# Altium PCB AN970.PcbDoc
Units mil, origin at the board's own origin, x right, y up, seen from the top; angles counter-clockwise.
Board outline 7207.12 x 4095.49 mil, 2 copper layers (TOP, BOTTOM), stack 10.4 mil thick; 1 components, 107 nets, 48 pads, 0 vias.
Unrouted connection lines stored in the file: 3.
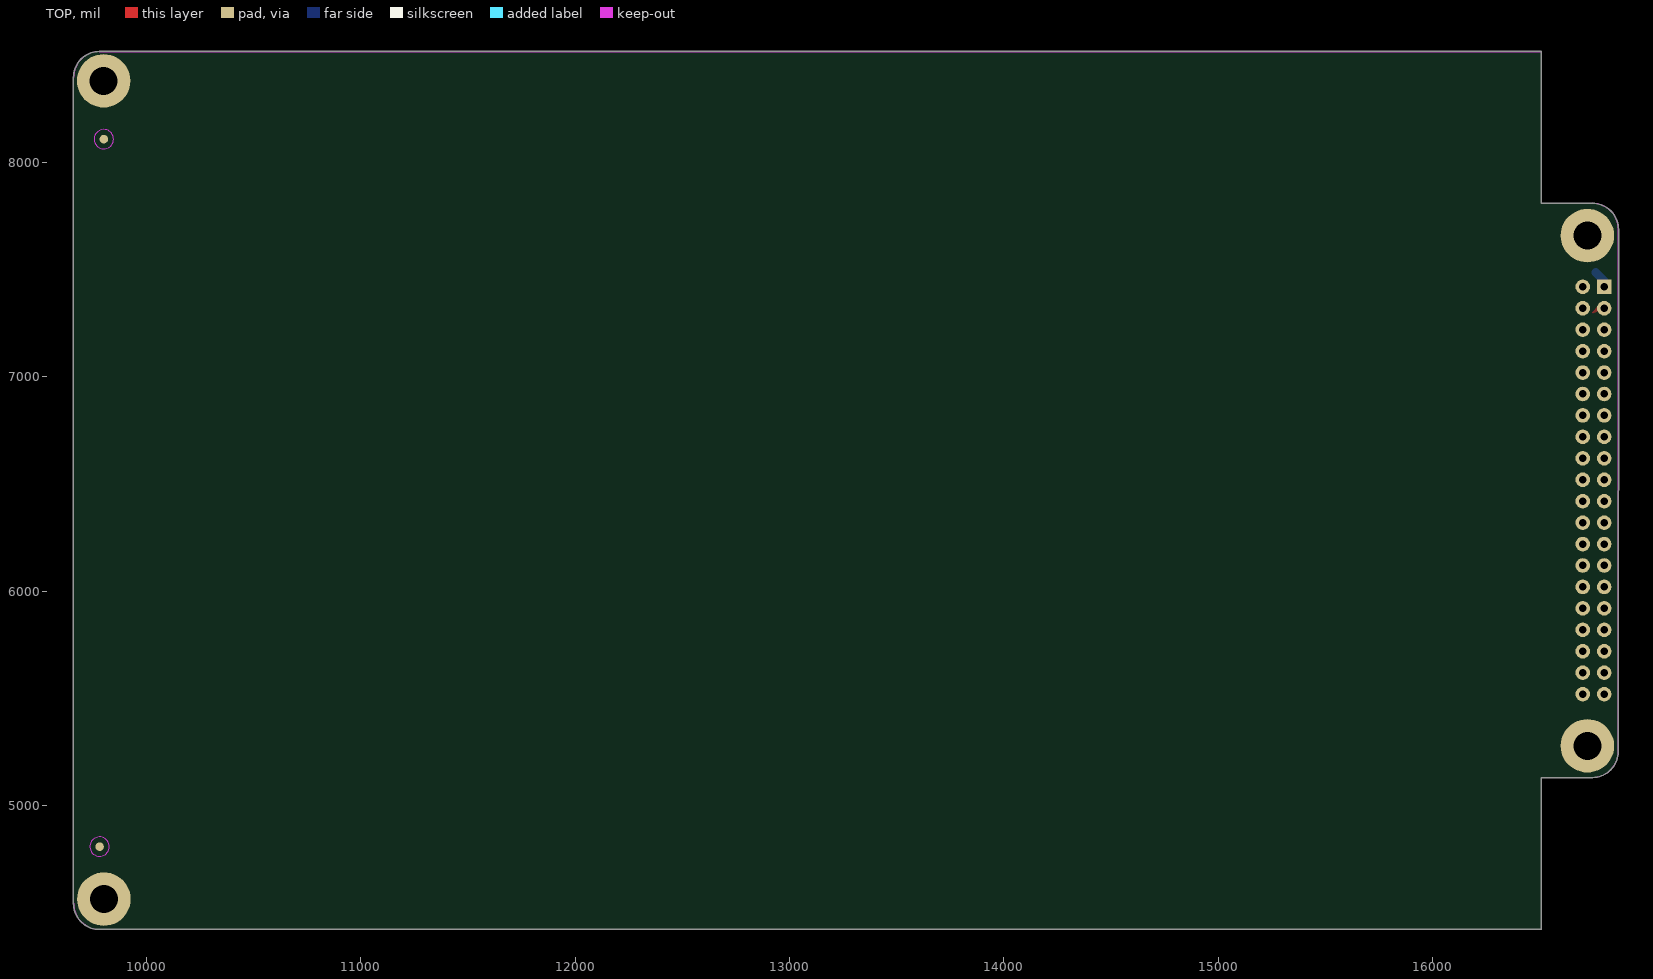
[diagram p0: TOP view]
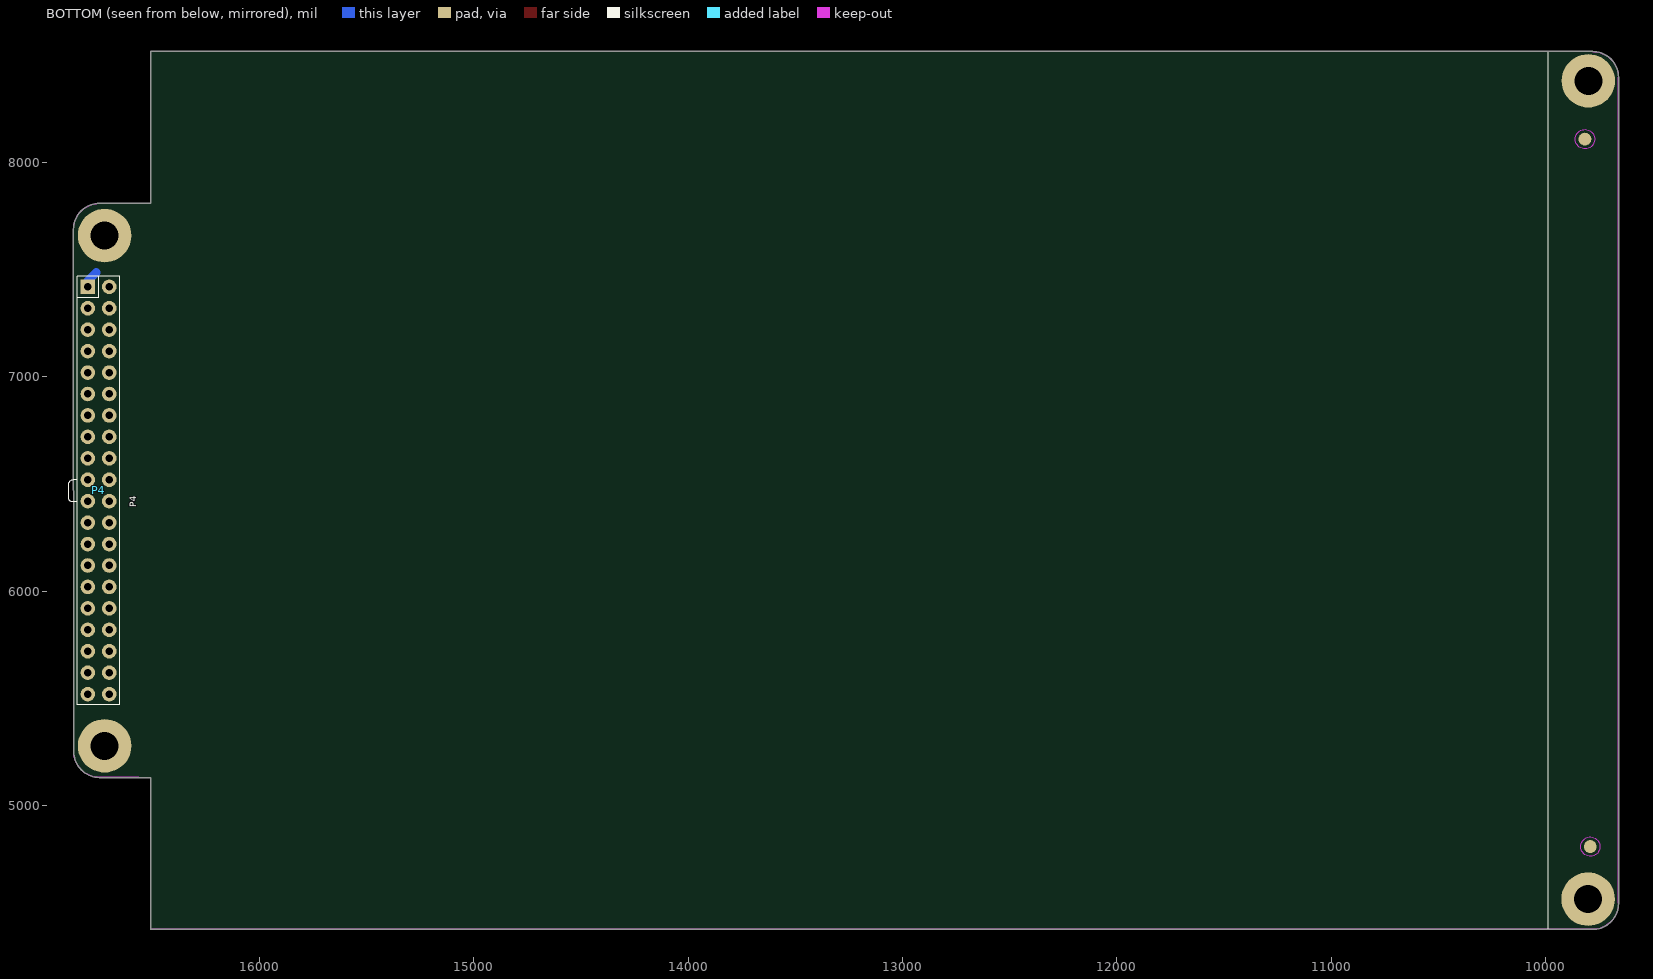
[diagram p1: BOTTOM view, seen from below]

## Layer stack, top to bottom
Top Solder: solder mask 0.4, Solder Resist, Dk 3.5
TOP: signal copper 1.2
Dielectric 1: core 8, FR-4, Dk 4.5
BOTTOM: signal copper 1.2
Bottom Solder: solder mask 0.4, Solder Resist, Dk 3.5

## Board outline
9659.53,4543.99 9659.56,8397.39 cw(c9780.44,8397.39) 9780.44,8518.27 16505.44,8518.27 16505.94,8517.77 16505.94,7809.61 16561.44,7809.61 16745.44,7809.78 cw(c16745.44,7688.57) 16866.65,7688.57 16865.28,5252.65 cw(c16744.07,5252.65) 16745.53,5131.45 16745.44,5131.44 16505.94,5131.44 16505.94,4423.28 16505.44,4422.78 9780.74,4422.78 cw(c9780.74,4543.99)

## Design rules (kind name [scope] priority, off if disabled: settings)
Clearance [All] p1: gap=10
PlaneConnect [All] p1: planeconnectstyle=Direct reliefexpansion=20 reliefentries=4 reliefconductorwidth=10 reliefairgap=10
PolygonConnect [All] p1: connectstyle=Direct reliefconductorwidth=10 reliefentries=4 polygonreliefangle="90 Angle" airgapwidth=10
RoutingVias [All] p1: holewidth=28 width=50 viastyle="Through Hole" minholewidth=28 minwidth=50 maxholewidth=28 maxwidth=50
SolderMaskExpansion [All] p1: expansion=4
Width [All] p1: maxlimit=10 minlimit=10 preferedwidth=10 impedancedriven=TRUE minimp=60.000000 maximp=60.000000 favimp=60.000000
29 further rules are at their usual default settings.

## Components (designator, comment, footprint, x,y, rotation, side; value= is the part's Value field where it differs from the comment)
P4 "CONN PCB 20X2-S_IDC40_CONN PCB" IDC40 16749.77,6470.52 r90 bottom

## Footprints (in the part's own frame and the unit in brackets; to place one, negate y for a bottom-side part, rotate by r counter-clockwise, add the part's x,y. Pads: shape width x height; smd on the part's side, far side on the other; paste and mask are expansions set on the pad)
IDC40 [mil] "IDC40"
  rect 68x68 / inner round 60 / far side rect 68x68 hole 35: 1(950,50)
  round 68 / inner round 60 / far side round 68 hole 35: 2(950,-50) 3(850,50) 4(850,-50) 5(750,50) 6(750,-50) 7(650,50) 8(650,-50) 9(550,50) 10(550,-50) 11(450,50) 12(450,-50) 13(350,50) 14(350,-50) 15(250,50) 16(250,-50) 17(150,50) 18(150,-50) 19(50,50) 20(50,-50) 21(-50,50) 22(-50,-50) 23(-150,50) 24(-150,-50) 25(-250,50) 26(-250,-50) 27(-350,50) 28(-350,-50) 29(-450,50) 30(-450,-50) 31(-550,50) 32(-550,-50) 33(-650,50) 34(-650,-50) 35(-750,50) 36(-750,-50) 37(-850,50) 38(-850,-50) 39(-950,50) 40(-950,-50)
  silkscreen extent -1000,-100 1000,139

## Free pads (board coordinates)
  round 40 smd: 1(9781.44,4809.28) 1(9801.44,8109.28)
  round 60 smd far side: 1(9791.44,4809.28) 1(9816.44,8109.28)
  round 250 hole 130: 1(9800.44,8381.3) 1(9801.44,4564.28) 1(16721.44,5279.28) 1(16721.44,7659.28)

## Nets (pads, with @x,y where several pads share a name; then routed paths per layer and width w, separated by ;. In a path a pad name is that pad's centre, name@x,y a point inside that pad or via, vN(x,y) a via of type N, cw(c..) or ccw(c..) an arc to the next point about the centre after c; other vN are vias at no path point)
BACK_LED_PWM: P4.4
CABC_EN: 
D3V3: P4.39 P4.40
DRV_BLU: 
GND: P4.1 P4.37 P4.38 | length 83.1
  BOTTOM w40: 16760.44,7487.28 16799.77,7447.95 P4.1
INT: P4.3 | length 32.1
  TOP w6: P4.3@16767.68,7320.52 P4.3
LCD_B0: P4.17
LCD_B1: P4.18
LCD_B2: P4.15
LCD_B3: P4.16
LCD_B4: P4.13
LCD_B5: P4.14
LCD_B6: P4.11
LCD_B7: P4.12
LCD_DCLK: P4.9
LCD_DE: P4.10
LCD_G0: P4.25
LCD_G1: P4.26
LCD_G2: P4.23
LCD_G3: P4.24
LCD_G4: P4.21
LCD_G5: P4.22
LCD_G6: P4.19
LCD_G7: P4.20
LCD_GRB: 
LCD_HSYNC: P4.7
LCD_R0: P4.33
LCD_R1: P4.34
LCD_R2: P4.31
LCD_R3: P4.32
LCD_R4: P4.29
LCD_R5: P4.30
LCD_R6: P4.27
LCD_R7: P4.28
LCD_SCL: P4.36
LCD_SDA: P4.35
LCD_V1: 
LCD_V2: 
LCD_V3: 
LCD_V4: 
LCD_V5: 
LCD_V6: 
LCD_V7: 
LCD_V8: 
LCD_V9: 
LCD_V10: 
LCD_VSYNC: P4.8
N22408525: 
N22408531: 
N22408555: 
N22408617: 
N22408661: 
N22408663: 
N22408774: 
N22408808: 
N22408812: 
N22408886: 
N22419302: 
N22430048: 
N22430293: 
N22430750: 
N22431042: 
N22431742: 
N22432137: 
N22432563: 
N22432799: 
N22434075: 
N22434332: 
N22434995: 
N22435130: 
N22435133: 
N22435136: 
N22435139: 
N22435142: 
N22435145: 
N22442883: 
N22442934: 
N22442936: 
N22447645: 
N22466305: 
N22466309: 
N22466323: 
N22466369: 
N22466395: 
N22466397: 
N22466484: 
N22466510: 
N22466514: 
N22466546: 
N22473151: 
N22473232: 
N22473315: 
N22473368: 
N224319110: 
RL: 
RST: 
SCL: P4.5
SDA: P4.6
UD: 
VCC3V3: 
VCC5V: P4.2
VCOM: 
VDNA: 
VDPA: 
VGH_14V: 
VGL_-14V: 
VLED+: 

## Polygon pours and split planes (outlines as drawn)
INT on TOP "TOP-INT" (solid, pour order 26): 16749.29,7298.21 16787.74,7314.16 16800.47,7320.79 16771.82,7331.49 16745.92,7303 16745.75,7302.8 16745.6,7302.58 16745.47,7302.36 16745.36,7302.12 16745.28,7301.87 16745.21,7301.62 16745.16,7301.36 16745.14,7301.1 16745.14,7300.84 16745.17,7300.58 16745.21,7300.32 16745.28,7300.07 16745.37,7299.82 16745.48,7299.59 16745.62,7299.36 16745.77,7299.15 16745.94,7298.95 16746.12,7298.76 16746.32,7298.59 16746.54,7298.44 16746.76,7298.31 16747,7298.2 16747.25,7298.12 16747.5,7298.05 16747.76,7298 16748.02,7297.98 16748.28,7297.98 16748.54,7298.01 16748.8,7298.05 16749.05,7298.12 16749.29,7298.21
no net on PLACE_BOUND_BOTTOM (solid): 9831.58,4809.28 ccw(c9791.44,4809.28) 9791.44,4849.42 ccw(c9791.44,4809.28) 9751.3,4809.28 ccw(c9791.44,4809.28) 9791.44,4769.14 ccw(c9791.44,4809.28) 9831.58,4809.28
no net on PLACE_BOUND_BOTTOM (solid): 9856.58,8109.28 ccw(c9816.44,8109.28) 9816.44,8149.42 ccw(c9816.44,8109.28) 9776.3,8109.28 ccw(c9816.44,8109.28) 9816.44,8069.14 ccw(c9816.44,8109.28) 9856.58,8109.28
no net on PLACE_BOUND_TOP (solid): 9821.58,4809.28 ccw(c9781.44,4809.28) 9781.44,4849.42 ccw(c9781.44,4809.28) 9741.3,4809.28 ccw(c9781.44,4809.28) 9781.44,4769.14 ccw(c9781.44,4809.28) 9821.58,4809.28
no net on PLACE_BOUND_TOP (solid): 9841.58,8109.28 ccw(c9801.44,8109.28) 9801.44,8149.42 ccw(c9801.44,8109.28) 9761.3,8109.28 ccw(c9801.44,8109.28) 9801.44,8069.14 ccw(c9801.44,8109.28) 9841.58,8109.28

## Keep-outs
TOP:
  circle w1: c9781.44,4809.28 r45.14
  circle w1: c9801.44,8109.28 r45.14
BOTTOM:
  circle w1: c9791.44,4809.28 r45.14
  circle w1: c9816.44,8109.28 r45.14
Keep-Out Layer:
  lines w1: 16505.44,4423.28 9983.44,4423.28 9780.75,4423.28 cw(c9780.74,4543.99) 9660.03,4543.99 9660.06,8397.39 cw(c9780.44,8397.39) 9780.44,8517.77 9983.44,8517.77 16505.44,8517.77 ; 16561.43,5131.94 16745.44,5131.94 16744.07,5131.94 ccw(c16744.07,5252.65) 16864.78,5252.65 16866.15,7688.57 ccw(c16745.44,7688.57) 16745.44,7809.28

## Other copper
TOP:
  drawing of 321 lines, arcs and shapes, not listed
BOTTOM:
  pour cut-out: 0,0 10,0 10,10 0,10
  pour cut-out: 0,0 10,0 10,10 0,10
  pour cut-out: 0,0 10,0 10,10 0,10
  pour cut-out: 0,0 10,0 10,10 0,10
  pour cut-out: 0,0 10,0 10,10 0,10
  pour cut-out: 0,0 10,0 10,10 0,10
  pour cut-out: 0,0 10,0 10,10 0,10
  pour cut-out: 0,0 10,0 10,10 0,10
  pour cut-out: 0,0 10,0 10,10 0,10
  pour cut-out: 0,0 10,0 10,10 0,10
  pour cut-out: 0,0 10,0 10,10 0,10
  pour cut-out: 0,0 10,0 10,10 0,10
  pour cut-out: 0,0 10,0 10,10 0,10
  pour cut-out: 0,0 10,0 10,10 0,10
  pour cut-out: 0,0 10,0 10,10 0,10
  pour cut-out: 0,0 10,0 10,10 0,10
  pour cut-out: 0,0 10,0 10,10 0,10
  pour cut-out: 0,0 10,0 10,10 0,10
  pour cut-out: 0,0 10,0 10,10 0,10
  pour cut-out: 0,0 10,0 10,10 0,10
  pour cut-out: 0,0 10,0 10,10 0,10
  pour cut-out: 0,0 10,0 10,10 0,10
  pour cut-out: 0,0 10,0 10,10 0,10
  pour cut-out: 0,0 10,0 10,10 0,10
  pour cut-out: 0,0 10,0 10,10 0,10
  pour cut-out: 0,0 10,0 10,10 0,10
  pour cut-out: 0,0 10,0 10,10 0,10
  pour cut-out: 0,0 10,0 10,10 0,10
  pour cut-out: 0,0 10,0 10,10 0,10
  pour cut-out: 0,0 10,0 10,10 0,10
  pour cut-out: 0,0 10,0 10,10 0,10
  pour cut-out: 0,0 10,0 10,10 0,10
  pour cut-out: 0,0 10,0 10,10 0,10
  pour cut-out: 0,0 10,0 10,10 0,10
  pour cut-out: 0,0 10,0 10,10 0,10
  pour cut-out: 0,0 10,0 10,10 0,10
  pour cut-out: 0,0 10,0 10,10 0,10
  pour cut-out: 0,0 10,0 10,10 0,10
  pour cut-out: 0,0 10,0 10,10 0,10
  pour cut-out: 0,0 10,0 10,10 0,10
  pour cut-out: 0,0 10,0 10,10 0,10
  pour cut-out: 0,0 10,0 10,10 0,10
  pour cut-out: 0,0 10,0 10,10 0,10
  pour cut-out: 0,0 10,0 10,10 0,10
  pour cut-out: 0,0 10,0 10,10 0,10
  pour cut-out: 0,0 10,0 10,10 0,10
  pour cut-out: 0,0 10,0 10,10 0,10
  pour cut-out: 0,0 10,0 10,10 0,10
  pour cut-out: 0,0 10,0 10,10 0,10
  pour cut-out: 0,0 10,0 10,10 0,10
  pour cut-out: 0,0 10,0 10,10 0,10
  pour cut-out: 0,0 10,0 10,10 0,10
  pour cut-out: 0,0 10,0 10,10 0,10
  pour cut-out: 0,0 10,0 10,10 0,10
  pour cut-out: 0,0 10,0 10,10 0,10
  pour cut-out: 0,0 10,0 10,10 0,10
  pour cut-out: 0,0 10,0 10,10 0,10
  pour cut-out: 0,0 10,0 10,10 0,10
  pour cut-out: 0,0 10,0 10,10 0,10
  pour cut-out: 0,0 10,0 10,10 0,10
  pour cut-out: 0,0 10,0 10,10 0,10
  pour cut-out: 0,0 10,0 10,10 0,10
  pour cut-out: 0,0 10,0 10,10 0,10
  pour cut-out: 0,0 10,0 10,10 0,10
  pour cut-out: 0,0 10,0 10,10 0,10
  pour cut-out: 0,0 10,0 10,10 0,10
  pour cut-out: 0,0 10,0 10,10 0,10
  pour cut-out: 0,0 10,0 10,10 0,10
  pour cut-out: 0,0 10,0 10,10 0,10
  pour cut-out: 0,0 10,0 10,10 0,10
  pour cut-out: 0,0 10,0 10,10 0,10
  pour cut-out: 0,0 10,0 10,10 0,10
  pour cut-out: 0,0 10,0 10,10 0,10
  pour cut-out: 0,0 10,0 10,10 0,10
  pour cut-out: 0,0 10,0 10,10 0,10
  pour cut-out: 0,0 10,0 10,10 0,10
  pour cut-out: 0,0 10,0 10,10 0,10
  pour cut-out: 0,0 10,0 10,10 0,10
  pour cut-out: 0,0 10,0 10,10 0,10
  pour cut-out: 0,0 10,0 10,10 0,10
  pour cut-out: 0,0 10,0 10,10 0,10
  pour cut-out: 0,0 10,0 10,10 0,10
  pour cut-out: 0,0 10,0 10,10 0,10
  pour cut-out: 0,0 10,0 10,10 0,10
  pour cut-out: 0,0 10,0 10,10 0,10
  pour cut-out: 0,0 10,0 10,10 0,10
  pour cut-out: 0,0 10,0 10,10 0,10
  pour cut-out: 0,0 10,0 10,10 0,10
  pour cut-out: 0,0 10,0 10,10 0,10
  pour cut-out: 0,0 10,0 10,10 0,10
  pour cut-out: 0,0 10,0 10,10 0,10
  pour cut-out: 0,0 10,0 10,10 0,10
  pour cut-out: 0,0 10,0 10,10 0,10
  pour cut-out: 0,0 10,0 10,10 0,10
  pour cut-out: 0,0 10,0 10,10 0,10
  pour cut-out: 0,0 10,0 10,10 0,10
  pour cut-out: 0,0 10,0 10,10 0,10
  pour cut-out: 0,0 10,0 10,10 0,10
  pour cut-out: 0,0 10,0 10,10 0,10
  pour cut-out: 0,0 10,0 10,10 0,10
  pour cut-out: 0,0 10,0 10,10 0,10
  pour cut-out: 0,0 10,0 10,10 0,10
  pour cut-out: 0,0 10,0 10,10 0,10
  pour cut-out: 0,0 10,0 10,10 0,10
  pour cut-out: 0,0 10,0 10,10 0,10
  pour cut-out: 0,0 10,0 10,10 0,10
  pour cut-out: 0,0 10,0 10,10 0,10
  pour cut-out: 0,0 10,0 10,10 0,10
  pour cut-out: 0,0 10,0 10,10 0,10
  pour cut-out: 0,0 10,0 10,10 0,10
  pour cut-out: 0,0 10,0 10,10 0,10
  pour cut-out: 0,0 10,0 10,10 0,10
  pour cut-out: 0,0 10,0 10,10 0,10
  pour cut-out: 0,0 10,0 10,10 0,10
  pour cut-out: 0,0 10,0 10,10 0,10
  pour cut-out: 0,0 10,0 10,10 0,10
  pour cut-out: 0,0 10,0 10,10 0,10
  pour cut-out: 0,0 10,0 10,10 0,10
  pour cut-out: 0,0 10,0 10,10 0,10
  pour cut-out: 0,0 10,0 10,10 0,10
  pour cut-out: 0,0 10,0 10,10 0,10
  pour cut-out: 0,0 10,0 10,10 0,10
  pour cut-out: 0,0 10,0 10,10 0,10
  pour cut-out: 0,0 10,0 10,10 0,10
  pour cut-out: 0,0 10,0 10,10 0,10
  pour cut-out: 0,0 10,0 10,10 0,10
  pour cut-out: 0,0 10,0 10,10 0,10
  pour cut-out: 0,0 10,0 10,10 0,10
  pour cut-out: 0,0 10,0 10,10 0,10
  pour cut-out: 0,0 10,0 10,10 0,10
  pour cut-out: 0,0 10,0 10,10 0,10
  pour cut-out: 0,0 10,0 10,10 0,10
  pour cut-out: 0,0 10,0 10,10 0,10
  pour cut-out: 0,0 10,0 10,10 0,10
  pour cut-out: 0,0 10,0 10,10 0,10
  pour cut-out: 0,0 10,0 10,10 0,10
  pour cut-out: 0,0 10,0 10,10 0,10
  pour cut-out: 0,0 10,0 10,10 0,10
  pour cut-out: 0,0 10,0 10,10 0,10
  pour cut-out: 0,0 10,0 10,10 0,10
  pour cut-out: 0,0 10,0 10,10 0,10
  pour cut-out: 0,0 10,0 10,10 0,10
  pour cut-out: 0,0 10,0 10,10 0,10
  pour cut-out: 0,0 10,0 10,10 0,10
  pour cut-out: 0,0 10,0 10,10 0,10
  pour cut-out: 0,0 10,0 10,10 0,10
  pour cut-out: 0,0 10,0 10,10 0,10
  pour cut-out: 0,0 10,0 10,10 0,10
  pour cut-out: 0,0 10,0 10,10 0,10
  pour cut-out: 0,0 10,0 10,10 0,10
  pour cut-out: 0,0 10,0 10,10 0,10
  pour cut-out: 0,0 10,0 10,10 0,10
  pour cut-out: 0,0 10,0 10,10 0,10
  pour cut-out: 0,0 10,0 10,10 0,10
  pour cut-out: 0,0 10,0 10,10 0,10
  pour cut-out: 0,0 10,0 10,10 0,10
  pour cut-out: 0,0 10,0 10,10 0,10
  pour cut-out: 0,0 10,0 10,10 0,10
  pour cut-out: 0,0 10,0 10,10 0,10
  pour cut-out: 0,0 10,0 10,10 0,10
  pour cut-out: 0,0 10,0 10,10 0,10
  pour cut-out: 0,0 10,0 10,10 0,10

## Silkscreen, mask and mechanical layers (free items; w line width, h text height)
Bottom Overlay:
  lines w4: 9986.44,4425.28 9986.44,8515.28
NCLEGEND-1-2:
  lines w1: 11170.44,9372.28 15240.44,9372.28 ; 11170.44,9543.28 15240.44,9543.28 ; 11170.44,9714.28 15240.44,9714.28 ; 11170.44,9885.28 15240.44,9885.28 ; 11170.44,10056.28 15240.44,10056.28 ; 11436.44,9628.78 11448.44,9628.78 ; 11442.44,9622.78 11442.44,9634.78 ; 11714.44,9201.28 11714.44,9885.28 ; 12858.44,9201.28 12858.44,9885.28 ; 14002.44,9201.28 14002.44,9885.28 ; 14771.44,9201.28 14771.44,9885.28 ; 11170.44,9201.28 15240.44,9201.28 15240.44,10306.28 11170.44,10306.28 11170.44,9201.28 ; 11424.94,9440.28 11459.94,9440.28 11442.44,9475.28 11424.94,9440.28 ; 11432.44,9276.78 11452.44,9276.78 11442.44,9296.78 11432.44,9276.78
  text "DRILL CHART" at 12875.44,10193.78 h75
  text "ALL UNITS ARE IN MILS" at 12575.44,9943.78 h75
  text "FIGURE" at 11262.44,9772.78 h75
  text "SIZE" at 12166.44,9772.78 h75
  text "TOLERANCE" at 13160.44,9772.78 h75
  text "PLATED" at 14206.94,9772.78 h75
  text "QTY" at 14915.94,9772.78 h75
  text "12.0" at 12166.44,9591.28 h75
  text "+3.0/-3.0" at 13160.44,9591.28 h75
  text "PLATED" at 14206.94,9591.28 h75
  text "2444" at 14885.94,9591.28 h75
  text "35.0" at 12166.44,9420.28 h75
  text "+3.0/-3.0" at 13160.44,9420.28 h75
  text "PLATED" at 14206.94,9420.28 h75
  text "40" at 14945.94,9420.28 h75
  text "130.0" at 12136.44,9249.28 h75
  text "+3.0/-3.0" at 13160.44,9249.28 h75
  text "PLATED" at 14206.94,9249.28 h75
  text "4" at 14975.94,9249.28 h75
DRAWING_ORIGIN:
  lines w1: 9776.44,4564.28 9826.44,4564.28 ; 9801.44,4539.28 9801.44,4589.28
PIN_NUMBER:
  text "1" at 9790.44,8381.3 h25
  text "1" at 9781.44,8109.28 h25
  text "1" at 9796.44,8109.28 h25
  text "1" at 16711.44,5279.28 h25
  text "1" at 9761.44,4809.28 h25
  text "1" at 9771.44,4809.28 h25
  text "1" at 9791.44,4564.28 h25
PLACE_BOUND_TOP:
  region: 16596.44,5154.28 16846.44,5154.28 16846.44,5404.28 16596.44,5404.28
  region: 16596.44,7534.28 16846.44,7534.28 16846.44,7784.28 16596.44,7784.28
  region: 9676.44,4439.28 9926.44,4439.28 9926.44,4689.28 9676.44,4689.28
  region: 9675.44,8256.3 9925.44,8256.3 9925.44,8506.3 9675.44,8506.3
ASSEMBLY_TOP:
  lines w1: 9925.44,8256.3 9675.44,8256.3 9675.44,8506.3 9925.44,8506.3 ; 9926.44,4439.28 9676.44,4439.28 9676.44,4689.28 9926.44,4689.28 ; 16596.44,5404.28 16596.44,5154.28 16846.44,5154.28 16846.44,5404.28 ; 16596.44,7534.28 16846.44,7534.28 16846.44,7784.28 16596.44,7784.28
  text "U*" at 9799.44,8373.3 h25
  text "U*" at 9784.18,8105.29 h25
  text "U*" at 16720.44,5271.28 h25
  text "U*" at 9764.18,4805.29 h25
  text "U*" at 9800.44,4556.28 h25
ASSEMBLY_BOTTOM:
  text "U*" at 9833.7,8105.29 h25
  text "U*" at 9808.7,4805.29 h25

## Text inside footprints (layer, text, board x,y; h text height)
P4: PIN_NUMBER "8" at 16689.77,7120.52 h25 r90; PIN_NUMBER "12" at 16679.77,6920.52 h25 r90; PIN_NUMBER "16" at 16679.77,6720.52 h25 r90; PIN_NUMBER "10" at 16679.77,7020.52 h25 r90; PIN_NUMBER "14" at 16679.77,6820.52 h25 r90; PIN_NUMBER "35" at 16779.77,5720.52 h25 r90; PIN_NUMBER "31" at 16779.77,5920.52 h25 r90; PIN_NUMBER "3" at 16789.77,7320.52 h25 r90; PIN_NUMBER "33" at 16779.77,5820.52 h25 r90; PIN_NUMBER "32" at 16679.77,5920.52 h25 r90; PIN_NUMBER "4" at 16689.77,7320.52 h25 r90; PIN_NUMBER "9" at 16789.77,7020.52 h25 r90; PIN_NUMBER "21" at 16779.77,6420.52 h25 r90; PIN_NUMBER "22" at 16679.77,6420.52 h25 r90; PIN_NUMBER "7" at 16789.77,7120.52 h25 r90; PIN_NUMBER "36" at 16679.77,5720.52 h25 r90; PIN_NUMBER "5" at 16789.77,7220.52 h25 r90; PIN_NUMBER "6" at 16689.77,7220.52 h25 r90; PIN_NUMBER "19" at 16779.77,6520.52 h25 r90; PIN_NUMBER "20" at 16679.77,6520.52 h25 r90; PIN_NUMBER "2" at 16689.77,7420.52 h25 r90; PIN_NUMBER "24" at 16679.77,6320.52 h25 r90; PIN_NUMBER "23" at 16779.77,6320.52 h25 r90; PIN_NUMBER "26" at 16679.77,6220.52 h25 r90; PIN_NUMBER "25" at 16779.77,6220.52 h25 r90; PIN_NUMBER "28" at 16679.77,6120.52 h25 r90; PIN_NUMBER "11" at 16779.77,6920.52 h25 r90; PIN_NUMBER "18" at 16679.77,6620.52 h25 r90; PIN_NUMBER "27" at 16779.77,6120.52 h25 r90; PIN_NUMBER "29" at 16779.77,6020.52 h25 r90; PIN_NUMBER "15" at 16779.77,6720.52 h25 r90; PIN_NUMBER "30" at 16679.77,6020.52 h25 r90; PIN_NUMBER "17" at 16779.77,6620.52 h25 r90; PIN_NUMBER "13" at 16779.77,6820.52 h25 r90; PIN_NUMBER "34" at 16679.77,5820.52 h25 r90; PIN_NUMBER "40" at 16679.77,5520.52 h25 r90; PIN_NUMBER "39" at 16779.77,5520.52 h25 r90; PIN_NUMBER "1" at 16789.77,7420.52 h25 r90; PIN_NUMBER "37" at 16779.77,5620.52 h25 r90; PIN_NUMBER "38" at 16679.77,5620.52 h25 r90